# EAGLE board board (EAGLE 7.7.0)

Size 40 x 30 mm. Coordinates in mm from the lower left corner, seen from the top.
Outline: 0,0 40,0 40,30 0,30 0,0
Copper layers used: 

## Footprints (pad centres in the part's own frame; a part is rotated, then mirrored left to right if it is on the bottom)
PAD1 = smd 1 x 0.5: 1 0,0

## Placement (x,y rotation side)
P1  [PAD1]  10,10 0 top
P2  [PAD1]  30,10 0 top
P3  [PAD1]  10,20 0 top
P4  [PAD1]  30,20 0 top

## Library data of the parts
P1-P4 = stub

## Nets
GND: P1.1 P3.1
VCC: P2.1 P4.1